# Altium PCB PCB1.PcbDoc
Units mm, origin at the board's own origin, x right, y up, seen from the top; angles counter-clockwise.
Board outline 137 x 80 mm, 2 copper layers (Top Layer, Bottom Layer); 104 components, 97 nets, 542 pads, 0 vias.
Unrouted connection lines stored in the file: 215.
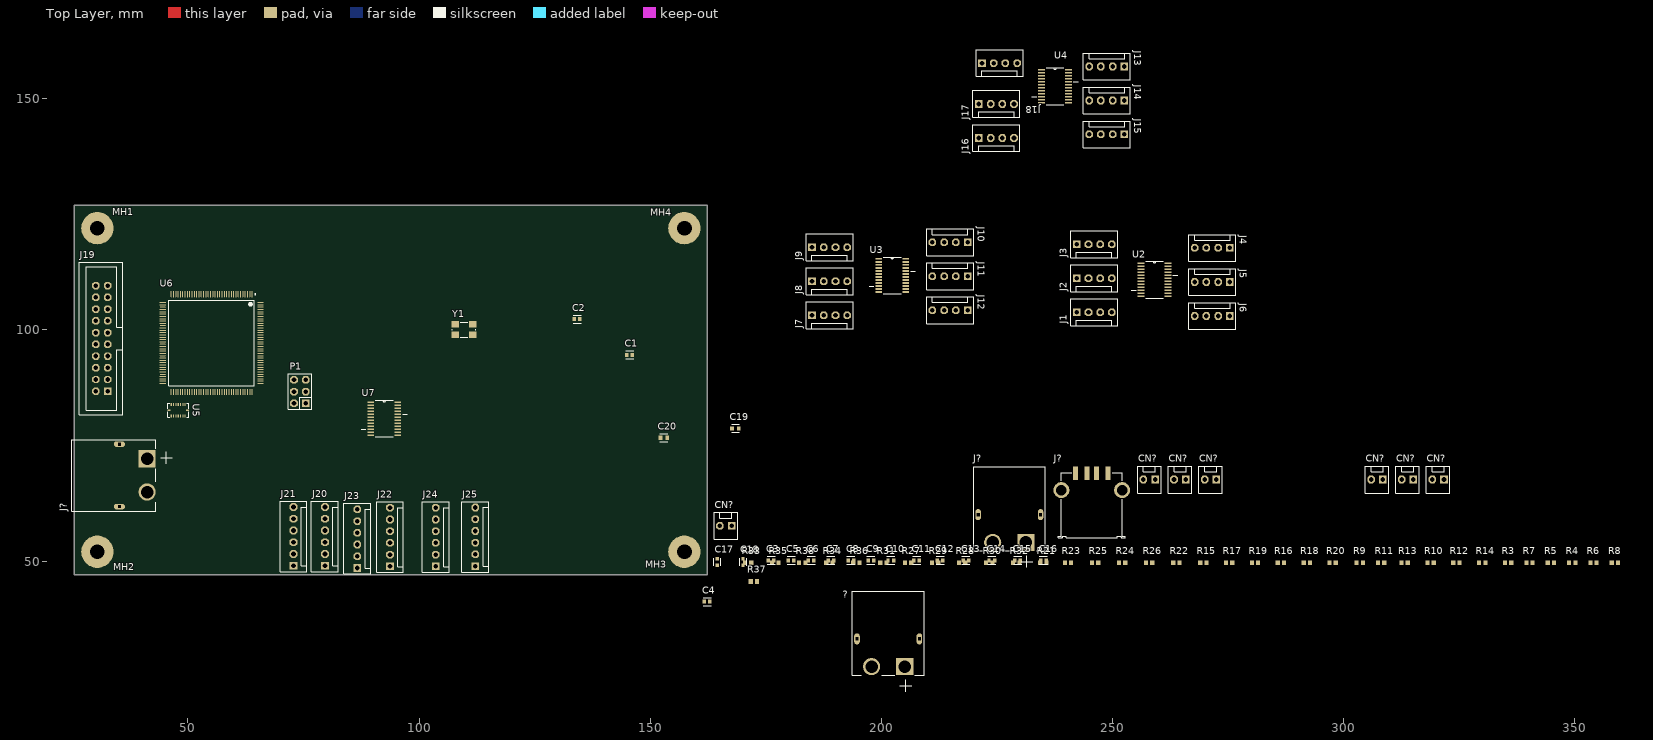
[diagram p0: Top Layer view]
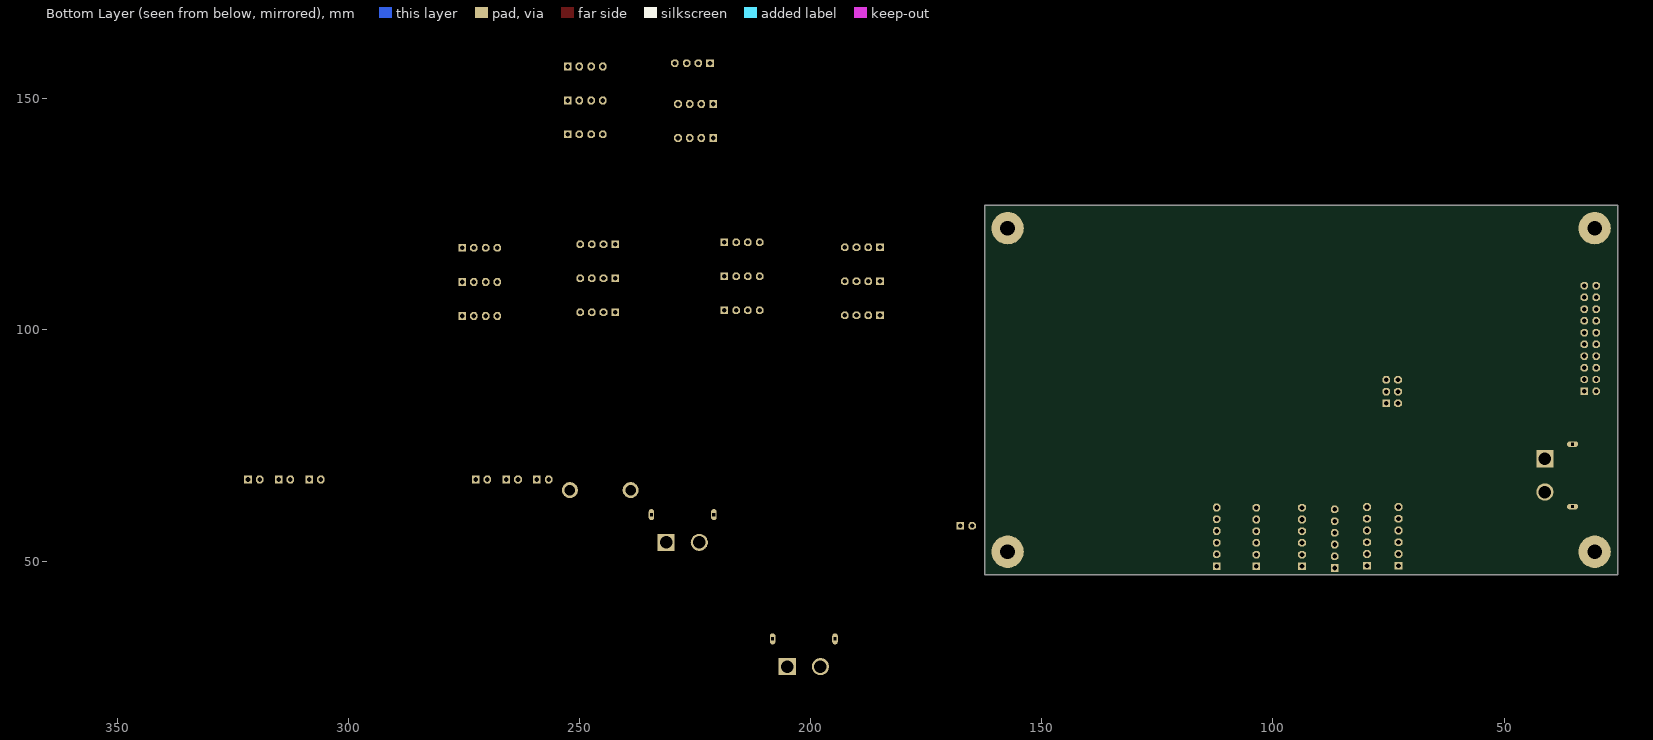
[diagram p1: Bottom Layer view, seen from below]

## Layer stack, top to bottom
Top Solder: solder mask 0.0102, Solder Resist, Dk 3.5
Top Layer: signal copper 0.0356
Dielectric 1: dielectric 0.32, FR-4, Dk 4.8
Bottom Layer: signal copper 0.0356
Bottom Solder: solder mask 0.0102, Solder Resist, Dk 3.5

## Board outline
25.4,47 162.4,47 162.4,127 25.4,127
board region "Default Layer Stack Region": 25.4,47 162.4,47 162.4,127 25.4,127
board region "Layer Stack Region 1": 25.4,47 162.4,47 162.4,127 25.4,127

## Design rules (kind name [scope] priority, off if disabled: settings)
Clearance [All] p1: gap=0.254 ignorepadtopadclearanceinfootprint=FALSE
PolygonConnect [All] p1: connectstyle=Relief reliefconductorwidth=0.254 reliefentries=4 polygonreliefangle="90 Angle" airgapwidth=0.254
RoutingVias [All] p1: holewidth=0.711 width=1.27 viastyle="Through Hole" minholewidth=0.711 minwidth=1.27 maxholewidth=0.711 maxwidth=1.27
SolderMaskExpansion [All] p1: expansion=0.102 istentingtop=FALSE
SupplyNets "Schematic Supply Nets_5" [InNet('3.3V')] p1: voltage=0.000
SupplyNets "Schematic Supply Nets_4" [InNet('+3.3V')] p2: voltage=0.000
SupplyNets "Schematic Supply Nets_3" [InNet('VDDIO')] p3: voltage=0.000
SupplyNets "Schematic Supply Nets_2" [InNet('VDD')] p4: voltage=0.000
SupplyNets "Schematic Supply Nets_1" [InNet('VCC')] p5: voltage=0.000
SupplyNets "Schematic Supply Nets" [InNet('GND')] p6: voltage=0.000
Width [All] p1: maxlimit=0.254 minlimit=0.254 preferedwidth=0.254
30 further rules are at their usual default settings.

## Classes and differential pairs
component class U_touch_sensors: CN?
component class U_ToF_sensors: J20 J21 J22 J23 J24 J25 U7
component class U_power_supply: ? CN? J?
component class Schield_elkapod: J? MH1 MH2 MH3 MH4
component class U_logic_controller: C1 C2 C3 C4 C5 C6 C7 C8 C9 C10 C11 C12 C13 C16 C17 C18 C19 C20 J19 P1 U5 U6 Y1 Y?
component class U_connection_of_encoders: J1 J2 J3 J4 J5 J6 J7 J8 J9 J10 J11 J12 J13 J14 J15 J16 J17 J18 R3 R4 R5 R6 R7 R8 R9 R10 R11 R12 R13 R14 R15 R16 R17 R18 R19 R20 R21 R22 R23 R24 R25 R26 R27 R28 R29 R30 R31 R32 R33 R34 R35 R36 R37 R38 U2 U3 U4

## Components (designator, comment, footprint, x,y, rotation, side; value= is the part's Value field where it differs from the comment)
? "XT60PW-M" AMASS_XT60PW-M 201.5,33.15 r0 top
C1 "33p" FP-C0603C-CF-MFG 145.575,94.6 r0 top value="2,700 pF"
C2 "33p" FP-C0603C-CF-MFG 134.2,102.325 r0 top value="2,700 pF"
C3 "100n" FP-C0603C-CF-MFG 176.159,50.127 r0 top value="2,700 pF"
C4 "1u" FP-C0603C-CF-MFG 162.325,41.225 r0 top value="2,700 pF"
C5 "100n" FP-C0603C-CF-MFG 180.484,50.127 r0 top value="2,700 pF"
C6 "100n" FP-C0603C-CF-MFG 184.809,50.127 r0 top value="2,700 pF"
C7 "100n" FP-C0603C-CF-MFG 189.109,50.127 r0 top value="2,700 pF"
C8 "100n" FP-C0603C-CF-MFG 193.434,50.127 r0 top value="2,700 pF"
C9 "100n" FP-C0603C-CF-MFG 197.76,50.127 r0 top value="2,700 pF"
C10 "100n" FP-C0603C-CF-MFG 202.06,50.127 r0 top value="2,700 pF"
C11 "100n" FP-C0603C-CF-MFG 207.66,50.127 r0 top value="2,700 pF"
C12 "100n" FP-C0603C-CF-MFG 212.735,50.127 r0 top value="2,700 pF"
C13 "100n" FP-C0603C-CF-MFG 218.311,50.127 r0 top value="2,700 pF"
C14 "100n" FP-C0603C-CF-MFG 223.911,50.127 r0 top value="2,700 pF"
C15 "100n" FP-C0603C-CF-MFG 229.486,50.127 r0 top value="2,700 pF"
C16 "100n" FP-C0603C-CF-MFG 235.086,50.127 r0 top value="2,700 pF"
C17 "2.2u" FP-C1608-080-0_1-MFG 164.533,49.802 r90 top
C18 "2.2u" FP-C1608-080-0_1-MFG 170.108,49.802 r90 top
C19 "100nF" FP-CC0603-DA-MFG 168.45,78.7 r0 top value="100 nF"
C20 "100nF" FP-CC0603-DA-MFG 152.975,76.65 r0 top value="100 nF"
CN? "KK/2,54mm" KK/2.54/2 166.358,57.603 r0 top
CN? "KK/2,54mm" KK/2.54/2 307.265,67.628 r0 top
CN? "KK/2,54mm" KK/2.54/2 320.491,67.628 r0 top
CN? "KK/2,54mm" KK/2.54/2 271.238,67.628 r0 top
CN? "KK/2,54mm" KK/2.54/2 264.613,67.628 r0 top
CN? "KK/2,54mm" KK/2.54/2 257.988,67.628 r0 top
CN? "KK/2,54mm" KK/2.54/2 313.865,67.628 r0 top
J1 "kk connector" KK/2.54/4 246.096,103.81 r180 top
J2 "KK connector" KK/2.54/4 246.096,111.16 r180 top
J3 "KK connector" KK/2.54/4 246.096,118.511 r180 top
J4 "KK connector" KK/2.54/4 271.604,117.738 r0 top
J5 "KK connector" KK/2.54/4 271.604,110.363 r0 top
J6 "KK connector" KK/2.54/4 271.604,103.013 r0 top
J7 "KK connector" KK/2.54/4 188.821,103.142 r180 top
J8 "KK connector" KK/2.54/4 188.821,110.493 r180 top
J9 "KK connector" KK/2.54/4 188.821,117.843 r180 top
J10 "KK connector" KK/2.54/4 214.879,118.935 r0 top
J11 "KK connector" KK/2.54/4 214.879,111.585 r0 top
J12 "KK connector" KK/2.54/4 214.879,104.234 r0 top
J13 "KK connector" KK/2.54/4 248.779,156.989 r0 top
J14 "KK connector" KK/2.54/4 248.779,149.638 r0 top
J15 "KK connector" KK/2.54/4 248.779,142.288 r0 top
J16 "KK connector" KK/2.54/4 224.921,141.509 r180 top
J17 "KK connector" KK/2.54/4 224.921,148.885 r180 top
J18 "KK connector" KK/2.54/4 225.595,157.725 r180 top
J19 "IDC Connector" IDC20 31.345,98.15 r90 top
J20 "KK connector" KK/2.54/6 79.65,55.33 r270 top
J21 "KK connector" KK/2.54/6 72.85,55.33 r270 top
J22 "KK connector" KK/2.54/6 93.725,55.18 r270 top
J23 "KK connector" KK/2.54/6 86.65,54.83 r270 top
J24 "KK connector" KK/2.54/6 103.6,55.18 r270 top
J25 "KK connector" KK/2.54/6 112.175,55.23 r270 top
J? "62900416021" 62900416021 245.537,62.053 r0 top
J? "XT60PW-M" AMASS_XT60PW-M 227.711,60.028 r0 top
J? "XT60PW-M" AMASS_XT60PW-M 35.175,68.525 r90 top
MH1 "mounting hole" MH?#1 31.325,120.1 r0 top
MH2 "mounting hole" MH?#2 32.35,53.225 r0 top
MH3 "mounting hole" MH?#3 155.225,52.45 r0 top
MH4 "mounting hole" MH?#4 155.9,120.95 r0 top
P1 "SWD" GP_3x2 75.49,84.11 r90 top
R3 "4.7k" RESC1609X50X30ML10T20 335.616,49.627 r0 top
R4 "4.7k" RESC1609X50X30ML10T20 349.492,49.627 r0 top
R5 "4.7k" RESC1609X50X30ML10T20 344.867,49.627 r0 top
R6 "4.7k" RESC1609X50X30ML10T20 354.092,49.627 r0 top
R7 "4.7k" RESC1609X50X30ML10T20 340.242,49.627 r0 top
R8 "4.7k" RESC1609X50X30ML10T20 358.718,49.627 r0 top
R9 "4.7k" RESC1609X50X30ML10T20 303.515,49.627 r0 top
R10 "4.7k" RESC1609X50X30ML10T20 318.841,49.627 r0 top
R11 "4.7k" RESC1609X50X30ML10T20 308.14,49.627 r0 top
R12 "4.7k" RESC1609X50X30ML10T20 324.416,49.627 r0 top
R13 "4.7k" RESC1609X50X30ML10T20 313.24,49.627 r0 top
R14 "4.7k" RESC1609X50X30ML10T20 330.016,49.627 r0 top
R15 "4.7k" RESC1609X50X30ML10T20 269.688,49.627 r0 top
R16 "4.7k" RESC1609X50X30ML10T20 286.464,49.627 r0 top
R17 "4.7k" RESC1609X50X30ML10T20 275.263,49.627 r0 top
R18 "4.7k" RESC1609X50X30ML10T20 292.064,49.627 r0 top
R19 "4.7k" RESC1609X50X30ML10T20 280.864,49.627 r0 top
R20 "4.7k" RESC1609X50X30ML10T20 297.665,49.627 r0 top
R21 "4.7k" RESC1609X50X30ML10T20 235.061,49.627 r0 top
R22 "4.7k" RESC1609X50X30ML10T20 263.838,49.627 r0 top
R23 "4.7k" RESC1609X50X30ML10T20 240.412,49.627 r0 top
R24 "4.7k" RESC1609X50X30ML10T20 252.112,49.627 r0 top
R25 "4.7k" RESC1609X50X30ML10T20 246.262,49.627 r0 top
R26 "4.7k" RESC1609X50X30ML10T20 257.963,49.627 r0 top
R27 "4.7k" RESC1609X50X30ML10T20 205.81,49.627 r0 top
R28 "4.7k" RESC1609X50X30ML10T20 217.511,49.627 r0 top
R29 "4.7k" RESC1609X50X30ML10T20 211.66,49.627 r0 top
R30 "4.7k" RESC1609X50X30ML10T20 223.361,49.627 r0 top
R31 "4.7k" RESC1609X50X30ML10T20 200.46,49.627 r0 top
R32 "4.7k" RESC1609X50X30ML10T20 229.211,49.627 r0 top
R33 "4.7k" RESC1609X50X30ML10T20 171.208,49.627 r0 top
R34 "4.7k" RESC1609X50X30ML10T20 188.759,49.627 r0 top
R35 "4.7k" RESC1609X50X30ML10T20 177.059,49.627 r0 top
R36 "4.7k" RESC1609X50X30ML10T20 194.609,49.627 r0 top
R37 "4.7k" RESC1609X50X30ML10T20 172.425,45.6 r0 top
R38 "4.7k" RESC1609X50X30ML10T20 182.909,49.627 r0 top
U2 "I2C MUX J1-6" SOP65P640X110-24N 259.104,110.854 r0 top
U3 "I2C MUX J7-12" SOP65P640X110-24N 202.375,111.775 r0 top
U4 "I2C MUX J13-18" SOP65P640X110-24N 237.579,152.701 r0 top
U5 "IMU" BMI088-Footprint-1 47.9,82.612 r270 top
U6 "STM32F446ZET6" FP-STM32F446ZET6-IPC_C 55.125,97.15 r270 top
U7 "I2C MUX J1-6" SOP65P640X110-24N 92.471,80.799 r0 top
Y1 "16MHz" "New footprint 1" 109.725,100.05 r0 top

## Footprints (in the part's own frame and the unit in brackets; to place one, negate y for a bottom-side part, rotate by r counter-clockwise, add the part's x,y. Pads: shape width x height; smd on the part's side, far side on the other; paste and mask are expansions set on the pad)
62900416021 [mm] "USB 2.0 SMT Type A Horizontal"
  rect 1.12x2.88 smd: 1(-3.5,6.95) 2(-1,6.95) 3(1,6.95) 4(3.5,6.95)
  round 3.45 hole 2.3: Shell(-6.57,3.28) Shell(6.57,3.28)
  silkscreen extent -7.25,-7 7.29,7, body extent -7.81,-7 7.81,8.41, height 7.81
AMASS_XT60PW-M [mm]
  rect 3.716x3.716 / inner round 3.716 / far side rect 3.716x3.716 hole 2.7: 1(3.6,-6)
  round 3.716 hole 2.7: 2(-3.6,-6)
  oval 1.2x2.4 hole 0.6 square: S1(6.75,0) S2(-6.75,0)
  silkscreen extent -7.75,-11.43 7.75,10.35, body extent -7.75,-7.85 7.75,10.35, height 8.4
BMI088-Footprint-1 [mm]
  rect 0.625x0.25 smd: 1(1.262,1.5) 2(1.262,1) 3(1.262,0.5) 4(1.262,0) 5(1.262,-0.5) 6(1.262,-1) 7(1.262,-1.5) 9(-1.262,-1.5) 10(-1.262,-1) 11(-1.262,-0.5) 12(-1.262,0) 13(-1.262,0.5) 14(-1.262,1) 15(-1.262,1.5)
  rect 0.25x0.625 smd: 8(0,-2.013) 16(0,2.013)
  silkscreen extent -1.55,-2.3 1.55,2.3, body extent -1.5,-2.25 1.5,2.25, height 0.95
FP-C0603C-CF-MFG [mm]
  rect 0.75x0.9 smd paste+0 mask+0: 1(-0.6,0) 2(0.6,0)
  silkscreen extent -0.87,-0.85 0.88,0.85, body extent -1.2,-0.6 1.2,0.6, height 0.25
FP-C1608-080-0_1-MFG [mm]
  rect 0.7x0.7 smd paste+0 mask+0: 1(-0.7,0) 2(0.7,0)
  silkscreen extent -0.8,-0.75 0.8,0.75, body extent -1.15,-0.55 1.15,0.55, height 0.25
FP-CC0603-DA-MFG [mm]
  rect 0.8x0.9 smd paste+0 mask+0: 1(-0.75,0) 2(0.75,0)
  silkscreen extent -0.85,-0.85 0.85,0.85, body extent -1.35,-0.75 1.35,0.75, height 0.25
FP-STM32F446ZET6-IPC_C [mm]
  rect 1.355x0.212 smd paste+0 mask+0: 1(-10.575,8.75)
  rrect100% 1.355x0.212 smd paste+0 mask+0: 2(-10.575,8.25) 3(-10.575,7.75) 4(-10.575,7.25) 5(-10.575,6.75) 6(-10.575,6.25) 7(-10.575,5.75) 8(-10.575,5.25) 9(-10.575,4.75) 10(-10.575,4.25) 11(-10.575,3.75) 12(-10.575,3.25) 13(-10.575,2.75) 14(-10.575,2.25) 15(-10.575,1.75) 16(-10.575,1.25) 17(-10.575,0.75) 18(-10.575,0.25) 19(-10.575,-0.25) 20(-10.575,-0.75) 21(-10.575,-1.25) 22(-10.575,-1.75) 23(-10.575,-2.25) 24(-10.575,-2.75) 25(-10.575,-3.25) 26(-10.575,-3.75) 27(-10.575,-4.25) 28(-10.575,-4.75) 29(-10.575,-5.25) 30(-10.575,-5.75) 31(-10.575,-6.25) 32(-10.575,-6.75) 33(-10.575,-7.25) 34(-10.575,-7.75) 35(-10.575,-8.25) 36(-10.575,-8.75) 73(10.575,-8.75) 74(10.575,-8.25) 75(10.575,-7.75) 76(10.575,-7.25) 77(10.575,-6.75) 78(10.575,-6.25) 79(10.575,-5.75) 80(10.575,-5.25) 81(10.575,-4.75) 82(10.575,-4.25) 83(10.575,-3.75) 84(10.575,-3.25) 85(10.575,-2.75) 86(10.575,-2.25) 87(10.575,-1.75) 88(10.575,-1.25) 89(10.575,-0.75) 90(10.575,-0.25) 91(10.575,0.25) 92(10.575,0.75) 93(10.575,1.25) 94(10.575,1.75) 95(10.575,2.25) 96(10.575,2.75) 97(10.575,3.25) 98(10.575,3.75) 99(10.575,4.25) 100(10.575,4.75) 101(10.575,5.25) 102(10.575,5.75) 103(10.575,6.25) 104(10.575,6.75) 105(10.575,7.25) 106(10.575,7.75) 107(10.575,8.25) 108(10.575,8.75)
  rrect100% 0.212x1.355 smd paste+0 mask+0: 37(-8.75,-10.575) 38(-8.25,-10.575) 39(-7.75,-10.575) 40(-7.25,-10.575) 41(-6.75,-10.575) 42(-6.25,-10.575) 43(-5.75,-10.575) 44(-5.25,-10.575) 45(-4.75,-10.575) 46(-4.25,-10.575) 47(-3.75,-10.575) 48(-3.25,-10.575) 49(-2.75,-10.575) 50(-2.25,-10.575) 51(-1.75,-10.575) 52(-1.25,-10.575) 53(-0.75,-10.575) 54(-0.25,-10.575) 55(0.25,-10.575) 56(0.75,-10.575) 57(1.25,-10.575) 58(1.75,-10.575) 59(2.25,-10.575) 60(2.75,-10.575) 61(3.25,-10.575) 62(3.75,-10.575) 63(4.25,-10.575) 64(4.75,-10.575) 65(5.25,-10.575) 66(5.75,-10.575) 67(6.25,-10.575) 68(6.75,-10.575) 69(7.25,-10.575) 70(7.75,-10.575) 71(8.25,-10.575) 72(8.75,-10.575) 109(8.75,10.575) 110(8.25,10.575) 111(7.75,10.575) 112(7.25,10.575) 113(6.75,10.575) 114(6.25,10.575) 115(5.75,10.575) 116(5.25,10.575) 117(4.75,10.575) 118(4.25,10.575) 119(3.75,10.575) 120(3.25,10.575) 121(2.75,10.575) 122(2.25,10.575) 123(1.75,10.575) 124(1.25,10.575) 125(0.75,10.575) 126(0.25,10.575) 127(-0.25,10.575) 128(-0.75,10.575) 129(-1.25,10.575) 130(-1.75,10.575) 131(-2.25,10.575) 132(-2.75,10.575) 133(-3.25,10.575) 134(-3.75,10.575) 135(-4.25,10.575) 136(-4.75,10.575) 137(-5.25,10.575) 138(-5.75,10.575) 139(-6.25,10.575) 140(-6.75,10.575) 141(-7.25,10.575) 142(-7.75,10.575) 143(-8.25,10.575) 144(-8.75,10.575)
  silkscreen extent -10.7,-9.25 9.25,9.58, body extent -11.35,-11.35 11.35,11.35, height 0.25
GP_3x2 [mil]
  rect 65x65 hole 39.37: 1(0,0)
  oct 65x65 hole 39.37: 2(0,100) 3(100,0) 4(100,100) 5(200,0) 6(200,100)
  silkscreen extent -50,-50 250,150, body extent -50,-50 250,150, height 330
IDC20 [mm] "2.54mm, 20 Pin IDC Male Connector"
  rect 1.6x1.6 hole 1: 1(-11.43,-1.27)
  oct 1.6x1.6 hole 1: 2(-11.43,1.27) 3(-8.89,-1.27) 4(-8.89,1.27) 5(-6.35,-1.27) 6(-6.35,1.27) 7(-3.81,-1.27) 8(-3.81,1.27) 9(-1.27,-1.27) 10(-1.27,1.27) 11(1.27,-1.27) 12(1.27,1.27) 13(3.81,-1.27) 14(3.81,1.27) 15(6.35,-1.27) 16(6.35,1.27) 17(8.89,-1.27) 18(8.89,1.27) 19(11.43,-1.27) 20(11.43,1.27)
  silkscreen extent -16.51,-4.57 16.51,4.83, body extent -16.51,-4.57 16.51,4.9, height 9.27
KK/2.54/2 [mm]
  rect 1.65x1.65 hole 1: 1(1.27,0)
  oct 1.65x1.65 hole 1: 2(-1.27,0)
  silkscreen extent -2.54,-2.92 2.54,2.9, body extent -2.54,-2.92 2.54,2.88, height 11.72
KK/2.54/4 [mm]
  rect 1.65x1.65 hole 1: 1(3.81,0)
  oct 1.65x1.65 hole 1: 2(1.27,0) 3(-1.27,0) 4(-3.81,0)
  silkscreen extent -5.08,-2.92 5.08,2.9, body extent -5.08,-2.94 5.08,2.86, height 11.72
KK/2.54/6 [mm]
  rect 1.65x1.65 hole 1: 1(6.35,0)
  oct 1.65x1.65 hole 1: 2(3.81,0) 3(1.27,0) 4(-1.27,0) 5(-3.81,0) 6(-6.35,0)
  silkscreen extent -7.62,-2.92 7.62,2.9, body extent -7.62,-2.92 7.62,2.88, height 11.72
MH?#1 [mm] "mounting hole 3mm padded"
  round 7 hole 3.2: 1(-0.925,1.9)
MH?#2 [mm] "mounting hole 3mm padded"
  round 7 hole 3.2: 1(-1.95,-1.225)
MH?#3 [mm] "mounting hole 3mm padded"
  round 7 hole 3.2: 1(2.175,-0.45)
MH?#4 [mm] "mounting hole 3mm padded"
  round 7 hole 3.2: 1(1.5,1.05)
"New footprint 1" [mm]
  rect 1.6x1.4 smd: 1(-1.9,-1.15) 2(1.9,-1.15) 3(1.9,1.15) 4(-1.9,1.15)
  silkscreen extent -2.54,-1.65 2.54,1.65, body extent -2.54,-1.65 2.54,1.65, height 1
RESC1609X50X30ML10T20 [mm] "Chip Resistor, 2-Leads, Body 1.55x0.85mm, IPC Low Density"
  rect 0.9x1.05 smd: 1(-0.675,0) 2(0.675,0)
  body extent -0.82,-0.48 0.82,0.48, height 0.5
SOP65P640X110-24N [mil]
  rect 58x14 smd: 1(-115,141) 2(-115,115) 3(-115,90) 4(-115,64) 5(-115,38) 6(-115,13) 7(-115,-13) 8(-115,-38) 9(-115,-64) 10(-115,-90) 11(-115,-115) 12(-115,-141) 13(115,-141) 14(115,-115) 15(115,-90) 16(115,-64) 17(115,-38) 18(115,-13) 19(115,13) 20(115,38) 21(115,64) 22(115,90) 23(115,115) 24(115,141)
  silkscreen extent -197,-156 197,156, body extent -126,-154 126,154, height 43

## Part data
? J? J?: "Socket, DC supply, male, PIN: 2", Package=Package, Availability="Not in stock", Check_prices=https://www.snapeda.com/parts/XT60PW-M/AMASS/view-part/?ref=eda, MF=AMASS, MP=XT60PW-M, price=None, SnapEDA_Link=https://www.snapeda.com/parts/XT60PW-M/AMASS/view-part/?ref=snap
C1 C2: library part CMP-03020-030291-1, "Cap Ceramic 0.0027uF 25V C0G 1% SMD 0603 125°C Paper T/R", Capacitance="2,700 pF", manufacturer=KEMET, Manufacturer Part Number=C0603C272F3GAC7867, Package=C0603C-CF, Temperature="-55°C to +125°C", Temperature Characteristic=C0G, Temperature Coefficient=30ppm/°C, Temperature Range High=+125°C, Temperature Range Low=-55°C, Tolerance=0.01, Voltage Rating="25 V", Automotive=Yes, Automotive Grade="Grade 1", Category=Cap, componentlink2description=Datasheet, componentlink2url=https://api.kemet.com/component-edge/download/datasheet/C0603C100J5GACAUTO.pdf, Device Class L1="Passive Components", Device Class L2=Capacitors, Device Class L3="Ceramic Capacitors", Digikey Description="Cap Ceramic 0.0027uF 25V C0G 1% SMD 0603 125°C Paper T/R", Height=0.87mm, Lead Free=Yes, Material=Ceramic, Octopart=https://octopart.com/c0603c272f3gac7867-kemet-90390867, RoHS=TRUE
C3 C5 C6 C7 C8 C9 C10 C11 C12 C13 C14 C15 C16: library part CMP-03020-030291-1, "CAP CER 100nF 25V X5R 0603 C0603C272F3GAC7867", Capacitance="2,700 pF", manufacturer=KEMET, Manufacturer Part Number=C0603C272F3GAC7867, Package=C0603C-CF, Temperature="-55°C to +125°C", Temperature Characteristic=C0G, Temperature Coefficient=30ppm/°C, Temperature Range High=+125°C, Temperature Range Low=-55°C, Tolerance=0.01, Voltage Rating="25 V", Automotive=Yes, Automotive Grade="Grade 1", Category=Cap, componentlink2description=Datasheet, componentlink2url=https://api.kemet.com/component-edge/download/datasheet/C0603C100J5GACAUTO.pdf, Device Class L1="Passive Components", Device Class L2=Capacitors, Device Class L3="Ceramic Capacitors", Digikey Description="Cap Ceramic 0.0027uF 25V C0G 1% SMD 0603 125°C Paper T/R", Height=0.87mm, Lead Free=Yes, Material=Ceramic, Octopart=https://octopart.com/c0603c272f3gac7867-kemet-90390867, RoHS=TRUE
C4: library part CMP-03020-030291-1, "CAP CER 1uF 16V X5R 0603 C0603C272F3GAC7867", Capacitance="2,700 pF", manufacturer=KEMET, Manufacturer Part Number=C0603C272F3GAC7867, Package=C0603C-CF, Temperature="-55°C to +125°C", Temperature Characteristic=C0G, Temperature Coefficient=30ppm/°C, Temperature Range High=+125°C, Temperature Range Low=-55°C, Tolerance=0.01, Voltage Rating="25 V", Automotive=Yes, Automotive Grade="Grade 1", Category=Cap, componentlink2description=Datasheet, componentlink2url=https://api.kemet.com/component-edge/download/datasheet/C0603C100J5GACAUTO.pdf, Device Class L1="Passive Components", Device Class L2=Capacitors, Device Class L3="Ceramic Capacitors", Digikey Description="Cap Ceramic 0.0027uF 25V C0G 1% SMD 0603 125°C Paper T/R", Height=0.87mm, Lead Free=Yes, Material=Ceramic, Octopart=https://octopart.com/c0603c272f3gac7867-kemet-90390867, RoHS=TRUE
C17 C18: library part CMP-08246-003049-1, "Multilayer Ceramic Capacitors 2.2μF ±10% 25V X5R SMD 0603 C1608X5R1E225K080AB", Capacitance=2.2uF, Case Code (Imperial)=0603, Case Code (Metric)=1608, Dielectric=X5R, Dielectric Material=Ceramic, Max Operating Temperature=85°C, Min Operating Temperature=-55°C, Package Quantity=4000, Tolerance=10%, Voltage Rating=25V, Case/Package=0603, Depth=0.8mm, Height=0.8mm, Lead Free="Lead Free", Length=1.6mm, Mount="Surface Mount", packaging="Tape and Reel", Radiation Hardening=No, REACH SVHC="No SVHC", Resistor Type=Ceramic, RoHS Compliant=Yes, series=C, Termination=SMD/SMT, Thickness=0.035inch, Voltage Rating (DC)=25V, Weight=7.1E-05oz, Width=0.031inch
C19 C20: library part CMP-2100-03601-2, "CAP CER 0.1UF 50V X7R 0603 CC0603KRX7R9BB104", Capacitance="100 nF", manufacturer=YAGEO, Manufacturer Part Number=CC0603KRX7R9BB104, Package=CC0603-DA, Temperature="-55°C to +125°C", Temperature Characteristic=X7R, Temperature Coefficient=15%, Temperature Range High=+125°C, Temperature Range Low=-55°C, Tolerance=0.1, Voltage="50 V", Automotive=No, Category=Cap, componentlink2description=Datasheet, componentlink2url=http://www.yageo.com/documents/recent/UPY-GPHC_X7R_6.3V-to-50V_18.pdf, Device Class L1="Passive Components", Device Class L2=Capacitors, Device Class L3="Ceramic Capacitors", Digikey Description="CAP CER 0.1UF 50V X7R 0603", Footprint Url=http://www.yageo.com/exep/pages/download/literatures/UPY-C_GEN_24.pdf, Height=0.9mm, Lead Free=Yes, Material=Ceramic, Mouser Description="Multilayer Ceramic Capacitor, CC Series, 0.1 - F, - 10%, X7R, 50 V, 0603 [1608 Metric]", Octopart=https://octopart.com/cc0603krx7r9bb104-yageo-42244635, RoHS=TRUE, Voltage Rating="50 V"
CN? CN? CN? CN? CN? CN? CN?: library part CN_2x1, "Connector: PCB-cable; KK; socket; male; PIN:2; straight/right-angle; tinned; THT"
J1 J2 J3 J4 J5 J6 J7 J8 J9 J10 J11 J12 J13 J14 J15 J16 J17 J18: library part CN_4x1, "Connector: PCB-cable; KK; socket; male; PIN:4; straight/right-angle; tinned; THT"
J19: library part CN_10x2
J20 J21 J22 J23 J24 J25: library part CN_6x1, "Connector: PCB-cable; KK; socket; male; PIN:6; straight/right-angle; tinned; THT, KK/2,54mm"
J?: library part CMP-1502-03240-2, Contact Resistance=20mΩ, Current Rating=1.5A, Insulation Resistance=1GΩ, Max Operating Temperature=105°C, Min Operating Temperature=-40°C, Operating Supply Voltage=30V, Connector Type=USB, Contact Plating=Gold, Features=Shielded, Gender=Receptacle, Lead Free="Lead Free", Length=14.4mm, Mount="Horizontal, Surface Mount", NexarPartId=19991170, Number of Contacts=4, Number of Pins=4, Orientation=Horizontal, packaging="Cut Tape", REACH SVHC=Unknown, RoHS=Compliant, Termination=SMD/SMT, USB Standard="USB 2.0"
MH1: library part CMP-00030-00006-7, "mounting hole 3mm padded"
MH2 MH4: library part CMP-00030-00006-7, "Mmounting hole 3mm padded"
MH3: library part CMP-00030-00006-7, "MHmounting hole 3mm padded"
P1: library part CN_3x2
R3 R4 R5 R6 R7 R8 R9 R10 R11 R12 R13 R14 R15 R16 R17 R18 R19 R20 R21 R22 R23 R24 R25 R26 R27 R28 R29 R30 R31 R32 R33 R34 R35 R36 R37 R38: library part CMP-2000-03860-1, "RES 4,7K OHM 1% 0,1W 0603 RNCS0603BKE10K0", manufacturer="Vishay Dale", Part Number=CRCW060311K0FKEA
U2 U3 U7: library part CMP-020-000000-2, "Translating Multiplexer Interface 24-TSSOP PCA9547PW,118", Package="TSSOP-24 NXP Semiconductors", Availability=Unavailable, Component Type=Standard, Design Item ID=PCA9547PW,118, MF="NXP USA", MP=PCA9547PW,118, Pin Count=24, price=None, SnapEDA_Link=https://www.snapeda.com/parts/PCA9547PW,118/NXP%20USA%20Inc./view-part/571417/?ref=snap, Source=SnapEDAsch.SchLib
U4: library part CMP-020-000000-2, "Translating Multiplexer Interface 24-TSSOP PCA9547PW", Package="TSSOP-24 NXP Semiconductors", Availability=Unavailable, Component Type=Standard, Design Item ID=PCA9547PW,118, MF="NXP USA", MP=PCA9547PW,118, Pin Count=24, price=None, SnapEDA_Link=https://www.snapeda.com/parts/PCA9547PW,118/NXP%20USA%20Inc./view-part/571417/?ref=snap, Source=SnapEDAsch.SchLib
U5: library part CMP-00030-00005-6, "BMI088 Series 3.6 V 6 Axis Digital Output Accelerometer Motion Sensor - LGA-16"
U6: library part CMP-12105-000067-1, "IC MCU 32BIT 512KB FLASH 144LQFP", Ambient Temperature Range High=+85°C, Ambient Temperature Range Low=-40°C, Frequency=180MHz, manufacturer=STMicroelectronics, Max Junction Temp=+105°C, Max Supply Voltage=3.6V, Min Supply Voltage=1.7V, Package=LQFP144, Temperature="-40°C to +105°C", Automotive=No, Category=IC, componentlink2description=Datasheet, componentlink2url=https://www.st.com/content/ccc/resource/technical/document/datasheet/65/cb/75/50/53/d6/48/24/DM00141306.pdf/files/DM00141306.pdf/jcr:content/translations/en.DM00141306.pdf, Core Architecture="Arm Cortex-M4", Data Bus Width=32bits, Device Class L1="Integrated Circuits (ICs)", Device Class L2="Embedded Processors and Controllers", Device Class L3=Microcontrollers, Digikey Description="IC MCU 32BIT 512KB FLASH 144LQFP", Height=1.6mm, Interface=I2C,SPI,UART,USART,EBI/EMI,CAN,USB,LIN,IrDA,I2S,SMBus,Other, Lead Free=Yes, Manufacturer Part Number=STM32F446ZET6, Memory Size=512KBytes, Memory Type=FLASH, Mouser Description="32 Bit Microcontroller, High Performance, Arm Cortex-M4, 180 Mhz, 512 Kb, 128 Kb, 144, Lqfp", Number Of A/D Converters=3, Number Of Adc Channels=24, Number Of Cores=1, Number Of I2C Channels=4, Number Of I/Os=114, Number Of Pwm Channels=32, Number Of Spi Channels=4, Number Of Timers/Counters=14, Number Of Uart Channels=6, Number Of Usb Channels=2, Octopart=https://octopart.com/stm32f446zet6-stmicroelectronics-52642927, Ram Size=128KBytes, RoHS=TRUE, Standoff Height=0.05mm, Temperature Range High=+105°C, Temperature Range Low=-40°C
Y1: library part CMP-00030-00007-3, "resonator 16MHz LFXTAL030819BULK"

## Nets (pads, with @x,y where several pads share a name; then routed paths per layer and width w, separated by ;. In a path a pad name is that pad's centre, name@x,y a point inside that pad or via, vN(x,y) a via of type N, cw(c..) or ccw(c..) an arc to the next point about the centre after c; other vN are vias at no path point)
3.3V: C3.1 C4.1 C5.1 C6.1 C7.1 C8.1 C9.1 C10.1 C11.1 C12.1 C13.1 C14.1 C15.1 C16.1 U6.6 U6.17 U6.30 U6.32 U6.33 U6.39 U6.52 U6.62 U6.72 U6.84 U6.95 U6.108 U6.121 U6.131 U6.143 U6.144
+3.3V: U2.24 U3.24 U4.24
GND: C1.2 C2.2 C3.2 C4.2 C5.2 C6.2 C7.2 C8.2 C9.2 C10.2 C11.2 C12.2 C13.2 C14.2 C15.2 C16.2 C17.2 C18.2 C19.2 C20.1 P1.5 U2.1 U2.2 U2.12 U2.21 U3.2 U3.12 U3.21 U4.1 U4.12 U4.21 U5.2 U5.4 U5.6 U5.7 U6.16 U6.31 U6.38 U6.51 U6.61 U6.83 U6.94 U6.107 U6.120 U6.130 Y1.2 Y1.4
I2C1_MUX_N_RESET: U2.3 U3.3 U4.3 U6.122
I2C1_SCL: U2.22 U3.22 U4.22
I2C1_SDA: U2.23 U3.23 U4.23
I2C2_MUX_N_RESET: U6.12 U7.3
I2C2_SCL: U6.11 U7.22
I2C2_SDA: U6.10 U7.23
INT_20: J20.5
INT_21: J21.5
INT_22: J22.5
INT_23: J23.5
INT_24: J24.5
INT_25: J25.5
NetC1_1: C1.1 U6.24 Y1.1
NetC2_1: C2.1 U6.23 Y1.3
NetC17_1: C17.1 C18.1 U6.71 U6.106
NetR?_1: U6.138
NRST: P1.6 U6.25
PWM11: J19.4 U6.110
PWM12: J19.5 U6.133
PWM13: J19.6 U6.69
PWM21: J19.10 U6.48
PWM22: J19.11 U6.42
PWM23: J19.12 U6.43
PWM31: J19.16 U6.46
PWM32: J19.17 U6.47
PWM33: J19.18 U6.81
PWM41: J19.1 U6.82
PWM42: J19.2 U6.85
PWM43: J19.3 U6.86
PWM51: J19.7 U6.34
PWM52: J19.8 U6.35
PWM53: J19.9 U6.36
PWM61: J19.13 U6.37
PWM62: J19.14 U6.96
PWM63: J19.15 U6.97
"SCL J1": J1.2 R4.1 U2.5
"SCL J2": J2.2 R6.1 U2.7
"SCL J3": J3.2 R8.1 U2.9
"SCL J4": J4.2 R10.1 U2.11
"SCL J5": J5.2 R12.1 U2.14
"SCL J6": J6.2 R14.1 U2.16
"SCL J7": J7.2 R16.1 U3.5
"SCL J8": J8.2 R18.1 U3.7
"SCL J9": J9.2 R20.1 U3.9
"SCL J10": J10.2 R22.1 U3.11
"SCL J11": J11.2 R24.1 U3.14
"SCL J12": J12.2 R26.1 U3.16
"SCL J13": J13.2 R28.1 U4.5
"SCL J14": J14.2 R30.1 U4.7
"SCL J15": J15.2 R32.1 U4.9
"SCL J16": J16.2 R34.1 U4.11
"SCL J17": J17.2 R36.1 U4.14
"SCL J18": J18.2 R38.1 U4.16
SCL_20: J20.4 U7.5
SCL_21: J21.4 U7.7
SCL_22: J22.4 U7.9
SCL_23: J23.4 U7.11
SCL_24: J24.4 U7.14
SCL_25: J25.4 U7.16
"SDA J1": J1.3 R3.1 U2.4
"SDA J2": J2.3 R5.1 U2.6
"SDA J3": J3.3 R7.1 U2.8
"SDA J4": J4.3 R9.1 U2.10
"SDA J5": J5.3 R11.1 U2.13
"SDA J6": J6.3 R13.1 U2.15
"SDA J7": J7.3 R15.1 U3.4
"SDA J8": J8.3 R17.1 U3.6
"SDA J9": J9.3 R19.1 U3.8
"SDA J10": J10.3 R21.1 U3.10
"SDA J11": J11.3 R23.1 U3.13
"SDA J12": J12.3 R25.1 U3.15
"SDA J13": J13.3 R27.1 U4.4
"SDA J14": J14.3 R29.1 U4.6
"SDA J15": J15.3 R31.1 U4.8
"SDA J16": J16.3 R33.1 U4.10
"SDA J17": J17.3 R35.1 U4.13
"SDA J18": J18.3 R37.1 U4.15
SDA_20: J20.3 U7.4
SDA_21: J21.3 U7.6
SDA_22: J22.3 U7.8
SDA_23: J23.3 U7.10
SDA_24: J24.3 U7.13
SDA_25: J25.3 U7.15
SPI2_ACCEL_SELECT: U5.14 U6.77
SPI2_GYRO_SELECT: U5.5 U6.78
SPI2_MISO: U5.10 U5.15 U6.75
SPI2_MOSI: U5.9 U6.76
SPI2_SCK: U5.8 U6.74
SWCLK: P1.3 U6.109
SWDIO: P1.4 U6.105
VCC: U3.1 U4.2
VDD: C20.2 P1.1 U5.3
VDDIO: C19.1 U5.11
XSHUT: J20.6 J21.6 J22.6 J23.6 J24.6 J25.6 U6.13
pads on no net: ?.1 ?.2 ?.S1 ?.S2 CN?.1 CN?.2 J1.1 J1.4 J2.1 J2.4 J3.1 J3.4 J4.1 J4.4 J5.1 J5.4 J6.1 J6.4 J7.1 J7.4 J8.1 J8.4 J9.1 J9.4 J10.1 J10.4 J11.1 J11.4 J12.1 J12.4 J13.1 J13.4 J14.1 J14.4 J15.1 J15.4 J16.1 J16.4 J17.1 J17.4 J18.1 J18.4 J19.19 J19.20 J20.1 J20.2 J21.1 J21.2 J22.1 J22.2 J23.1 J23.2 J24.1 J24.2 J25.1 J25.2 J?.1 J?.2 J?.3 J?.4 J?.S1 J?.S2 J?.Shell MH1.1 MH2.1 MH3.1 MH4.1 P1.2 R3.2 R4.2 R5.2 R6.2 R7.2 R8.2 R9.2 R10.2 R11.2 R12.2 R13.2 R14.2 R15.2 R16.2 R17.2 R18.2 R19.2 R20.2 R21.2 R22.2 R23.2 R24.2 R25.2 R26.2 R27.2 R28.2 R29.2 R30.2 R31.2 R32.2 R33.2 R34.2 R35.2 R36.2 R37.2 R38.2 U2.17 U2.18 U2.19 U2.20 U3.17 U3.18 U3.19 U3.20 U4.17 U4.18 U4.19 U4.20 U5.1 U5.12 U5.13 U5.16 U6.1 U6.2 U6.3 U6.4 U6.5 U6.7 U6.8 U6.9 U6.14 U6.15 U6.18 U6.19 U6.20 U6.21 U6.22 U6.26 U6.27 U6.28 U6.29 U6.40 U6.41 U6.44 U6.45 U6.49 U6.50 U6.53 U6.54 U6.55 U6.56 U6.57 U6.58 U6.59 U6.60 U6.63 U6.64 U6.65 U6.66 U6.67 U6.68 U6.70 U6.73 U6.79 U6.80 U6.87 U6.88 U6.89 U6.90 U6.91 U6.92 U6.93 U6.98 U6.99 U6.100 U6.101 U6.102 U6.103 U6.104 U6.111 U6.112 U6.113 U6.114 U6.115 U6.116 U6.117 U6.118 U6.119 U6.123 U6.124 U6.125 U6.126 U6.127 U6.128 U6.129 U6.132 U6.134 U6.135 U6.136 U6.137 U6.139 U6.140 U6.141 U6.142 U7.1 U7.2 U7.12 U7.17 U7.18 U7.19 U7.20 U7.21 U7.24